# Altium PCB CoolerUI.PcbDoc
Units mm, origin at the board's own origin, x right, y up, seen from the top; angles counter-clockwise.
Board outline 152.4 x 101.6 mm, 2 copper layers (Top Layer, Bottom Layer); 39 components, 67 nets, 211 pads, 71 vias.
Unrouted connection lines stored in the file: 15.
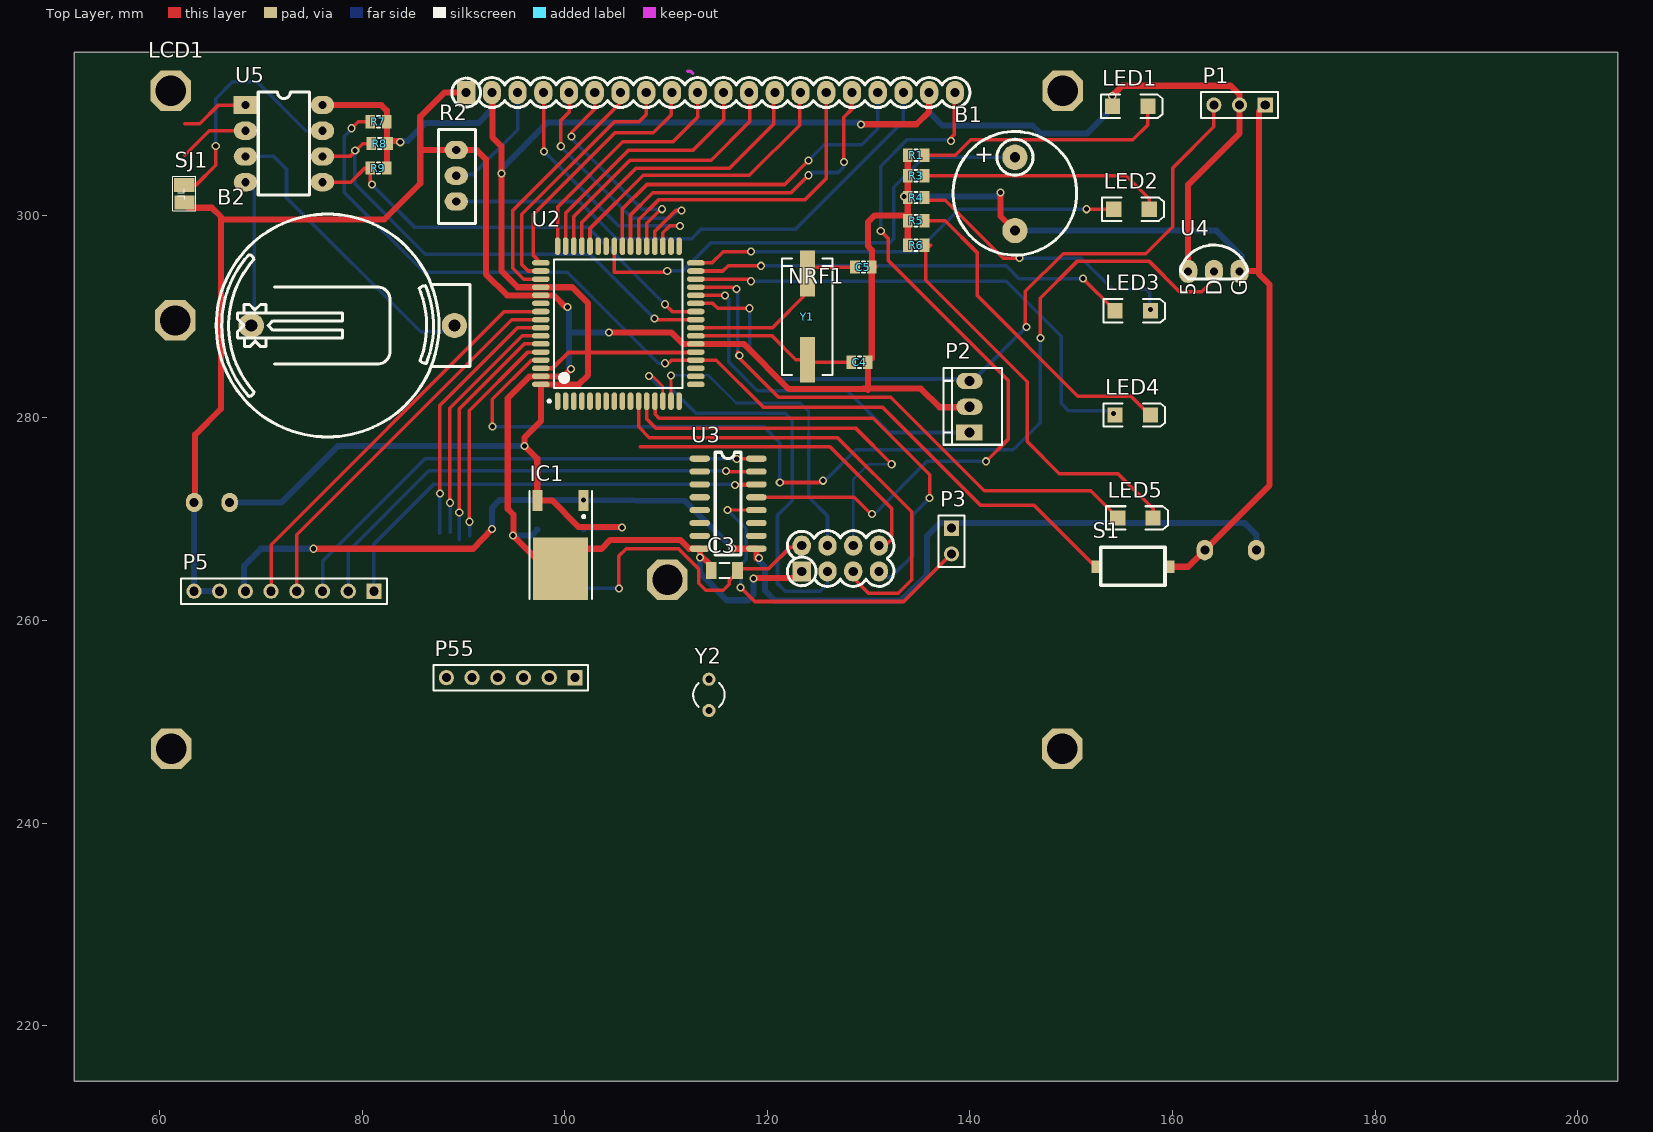
[diagram p0: Top Layer view]
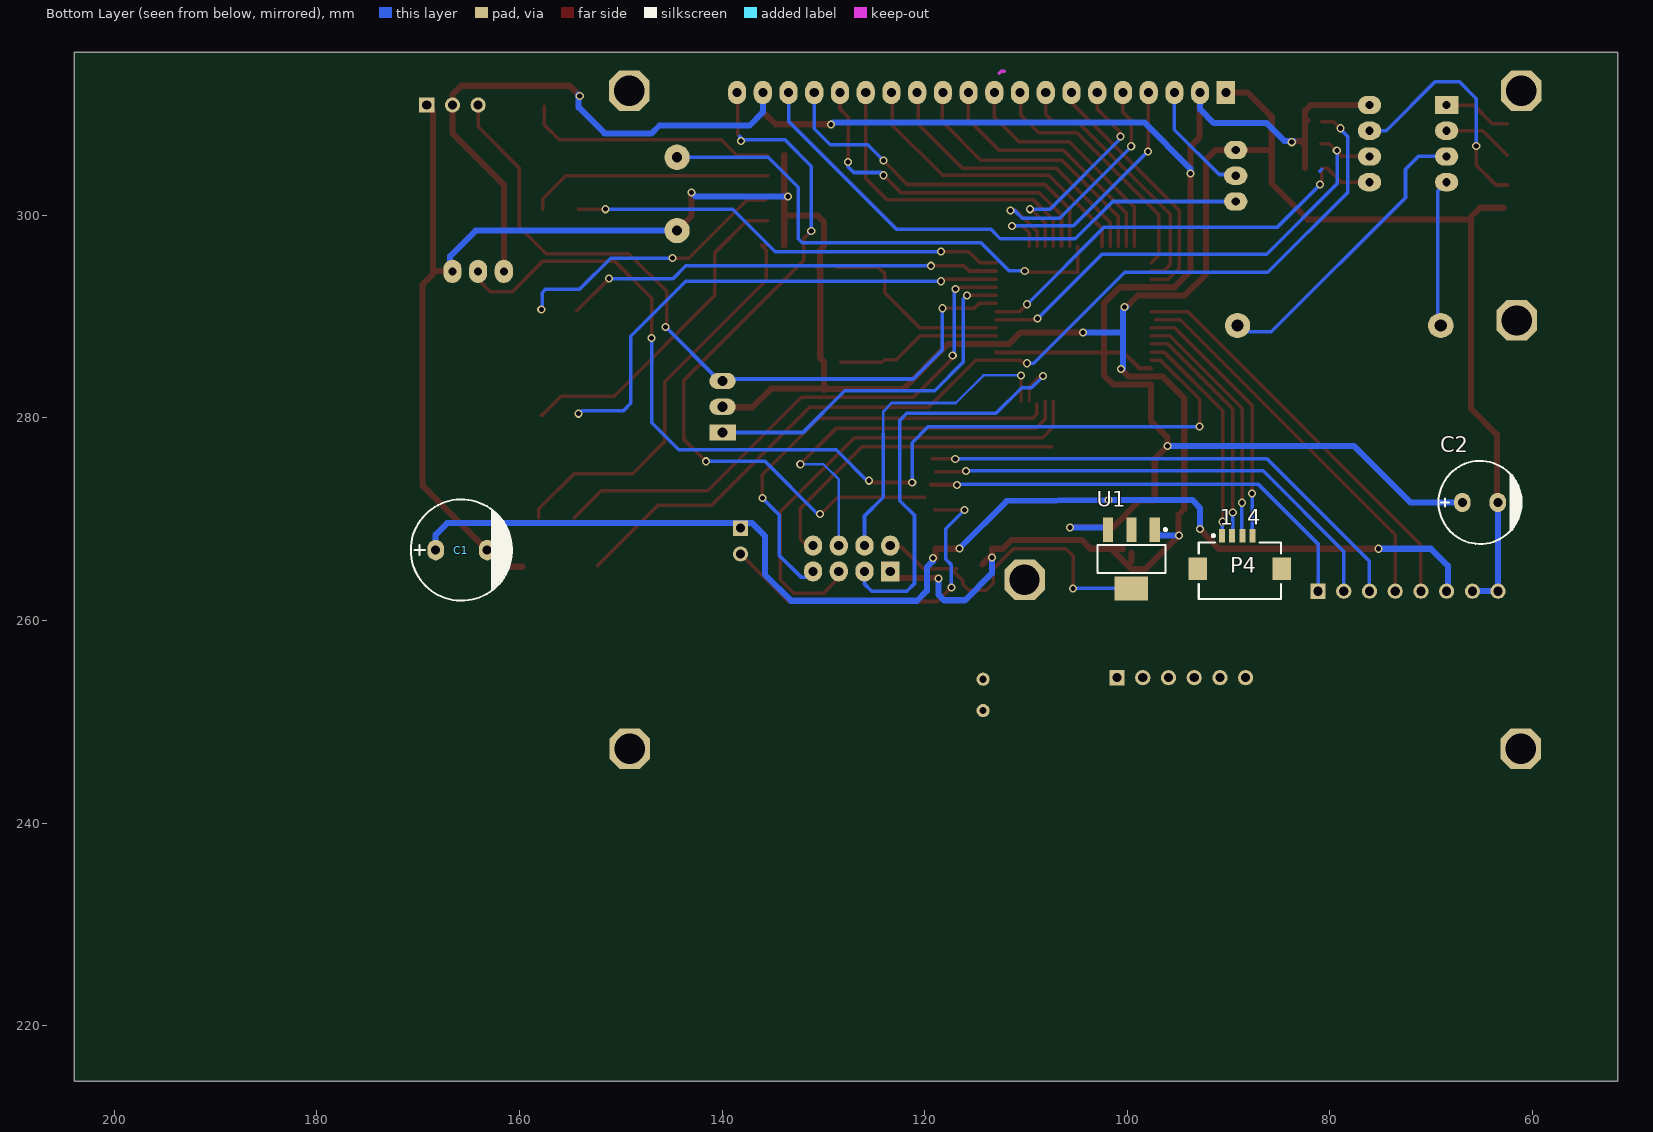
[diagram p1: Bottom Layer view, seen from below]
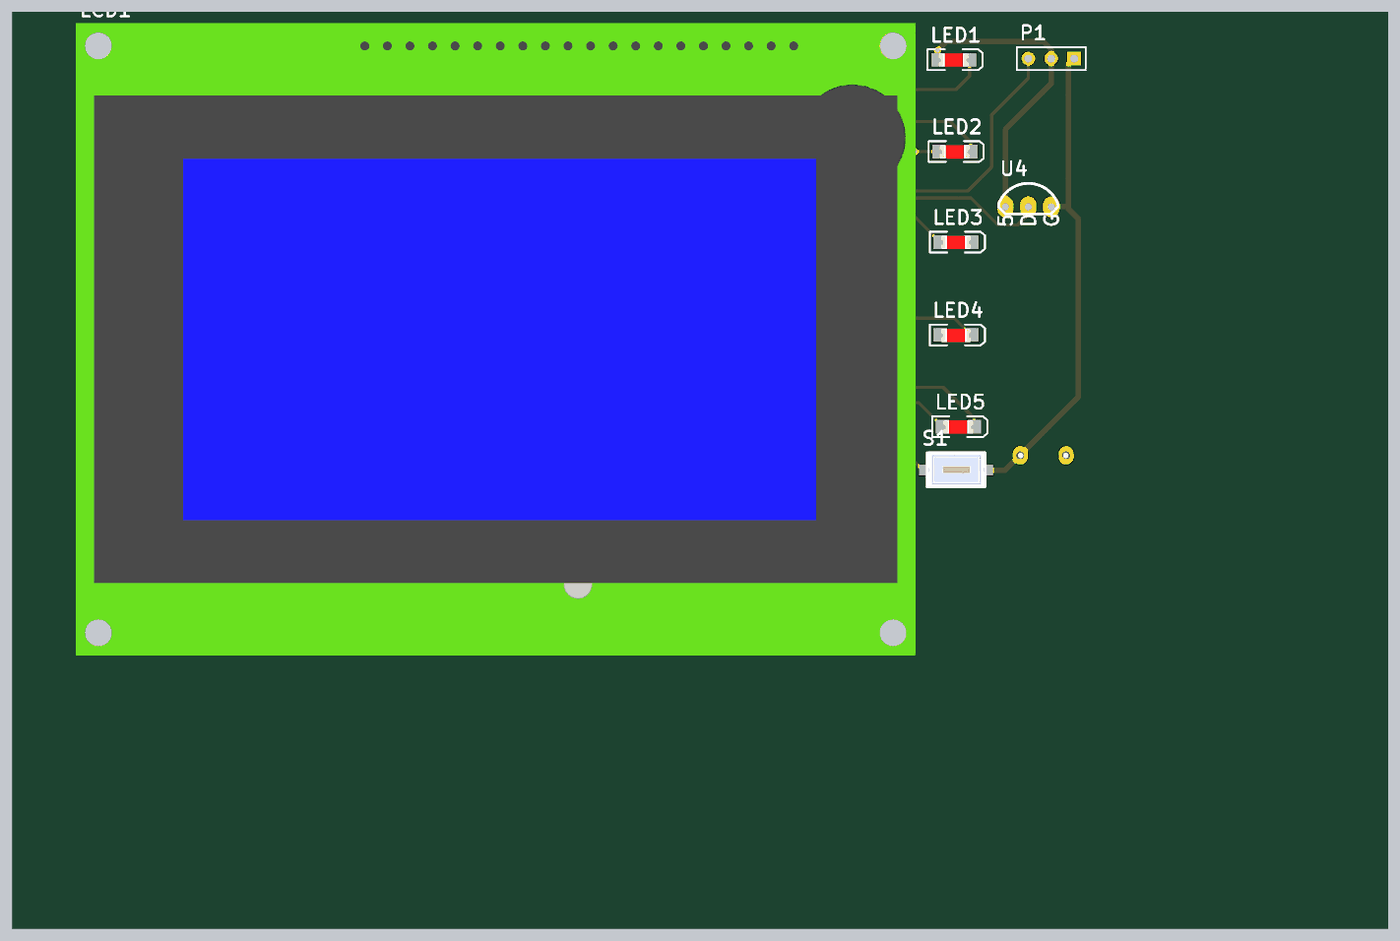
[diagram p2: 3D render of the assembled board from above, using the file's embedded part models]
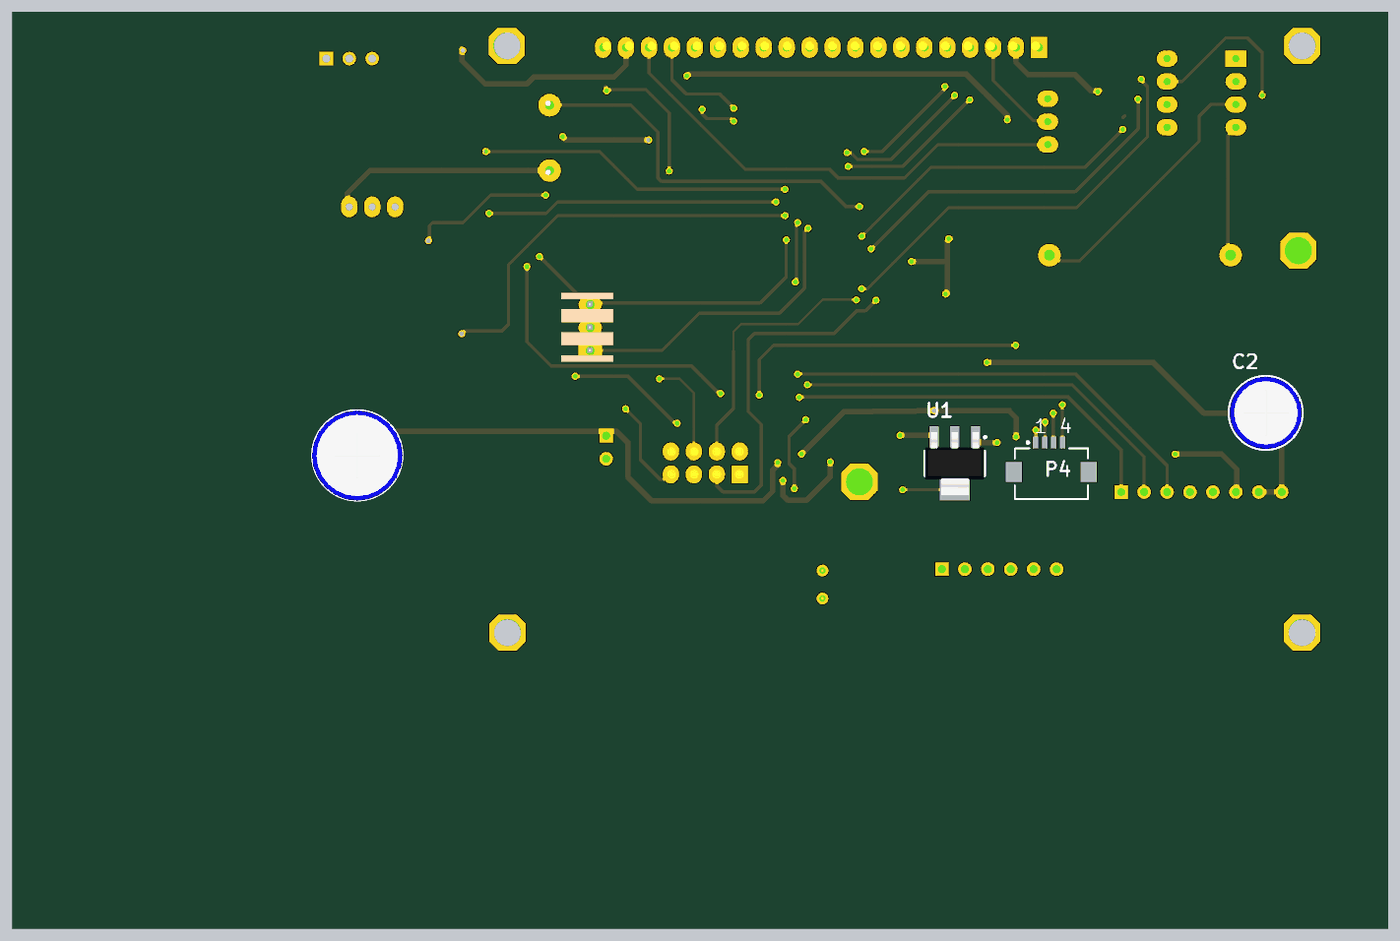
[diagram p3: 3D render of the assembled board from below, using the file's embedded part models]

## Layer stack, top to bottom
Top Solder: solder mask 0.0102, Solder Resist, Dk 3.5
Top Layer: signal copper 0.0356
Dielectric1: dielectric 0.32, FR-4, Dk 4.8
Bottom Layer: signal copper 0.0356
Bottom Solder: solder mask 0.0102, Solder Resist, Dk 3.5

## Board outline
51.562,214.503 203.962,214.503 203.962,316.103 51.562,316.103

## Design rules (kind name [scope] priority, off if disabled: settings)
Clearance Clearance_2 [InPolygon] p1: gap=0.8
Clearance Clearance_1 [(OnLayer('Keep-Out Layer'))] p2: gap=0
Clearance [All] p3: gap=0.2
ComponentClearance [All] p1 off: gap=0.254 collisioncheckmode=3 verticalgap=0.254 showdistances=FALSE
HoleSize [All] p1: absolutevalues=TRUE maxlimit=5 minlimit=0.025 maxpercent=80.000 minpercent=20.000
MinimumSolderMaskSliver [All] p1 off: minsoldermaskwidth=0.254
PolygonConnect [All] p1: connectstyle=Relief reliefconductorwidth=0.254 reliefentries=4 polygonreliefangle="90 Angle" airgapwidth=0.254
RoutingVias [All] p1: holewidth=0.5 width=0.8 viastyle="Through Hole" minholewidth=0.5 minwidth=0.8 maxholewidth=0.5 maxwidth=0.8
SilkToSilkClearance [All] p1 off: silktosilkclearance=0.254
SilkToSolderMaskClearance [IsPad] p1 off: minsilkscreentomaskgap=0.254 clearancetoexposedcopper=TRUE
SolderMaskExpansion [All] p1: expansion=0.102
Width [All] p1: maxlimit=5 minlimit=0.1 preferedwidth=0.3
24 further rules are at their usual default settings.

## Components (designator, comment, footprint, x,y, rotation, side; value= is the part's Value field where it differs from the comment)
B1 "Buzzer" Buzzer 144.145,301.879 r90 top
B2 "BAT" BAT_H 89.1,289.125 r0 top
C1 "1000uf" "cap 04" 165.735,266.954 r0 bottom
C2 "470uf" "cap 03" 65.151,271.653 r0 bottom
C3 "100nF" SMD_CAP_1206 117.05,264.925 r180 top
C4 "18pf" SMD_CAP_0805 129.921,285.496 r180 top
C5 "18pf" SMD_CAP_0805 130.302,294.894 r180 top
IC1 "L78M05" TO-252 99.575,268.478 r180 top
LCD1 "LCD 64*128 KS0108" "KS0108 Graphical LCD" 112.141,312.547 r180 top locked
LED1 "Power" "LED SMD 1206" 155.829,310.769 r0 top
LED2 "Power" "LED SMD 1206" 155.956,300.609 r0 top
LED3 "Power" "LED SMD 1206" 156.083,290.576 r0 top
LED4 "Power" "LED SMD 1206" 156.083,280.289 r0 top
LED5 "Power" "LED SMD 1206" 156.337,270.129 r0 top
NRF1 "NRF24L01+_Module" NRF24L01+_Module 127.762,265.811 r90 top
P1 "IR remote" HDR1X3 169.164,310.896 r180 top
P2 "HWR" "Polarized Header 3" 139.827,281.051 r90 top
P3 "FanOut" HDR1X2 138.176,269.113 r270 top
P4 "TouchSocket" FPC,1mm,4way 88.85,265.3 r180 bottom
P5 "Header 8" HDR1X8 81.153,262.89 r180 top locked
P55 "Programmer" HDR1X6 101,254.35 r180 top
R1 "10k" "RES 0805 (2012X06L)" 135.509,305.943 r180 top
R2 "POT" MOL_1 89.281,306.451 r270 top
R3 "10k" "RES 0805 (2012X06L)" 135.509,303.911 r180 top
R4 "10k" "RES 0805 (2012X06L)" 135.509,301.752 r180 top
R5 "10k" "RES 0805 (2012X06L)" 135.509,299.466 r180 top
R6 "10k" "RES 0805 (2012X06L)" 135.509,297.053 r180 top
R7 "10k" "RES 0805 (2012X06L)" 82.423,309.245 r180 top
R8 "10k" "RES 0805 (2012X06L)" 80.899,307.086 r0 top
R9 "10k" "RES 0805 (2012X06L)" 80.772,304.673 r0 top
S1 "Switch PB SMD" "Switch PB SMD" 152.908,267.208 r270 top
SJ1 "SmdJumper" "SMD Jumper" 62.475,302.125 r0 top
U1 "LM1117IMP-x.x" MP04A_N 99.575,266.065 r270 bottom
U2 "ATmega64-16AC" 64A_N 105.283,289.306 r90 top
U3 "ULN2003" SO-16 113.325,275.975 r0 top
U4 "LM35" LM35 161.55,294.475 r0 top
U5 "DS1307" DIP8 68.453,310.896 r0 top
Y1 "11.0592 MHz" "Crystal SMD" 123.952,290.576 r270 top
Y2 "32.768Khz" "XTAL RTC" 114.225,252.65 r0 top

## Footprints (in the part's own frame and the unit in brackets; to place one, negate y for a bottom-side part, rotate by r counter-clockwise, add the part's x,y. Pads: shape width x height; smd on the part's side, far side on the other; paste and mask are expansions set on the pad)
64A_N [mm] "Thin QFP, 64-Leads, Body 14x14mm, Pitch 0.8mm, IPC Medium Density"
  oval 1.75x0.55 smd: 1(-7.65,6) 2(-7.65,5.2) 3(-7.65,4.4) 4(-7.65,3.6) 5(-7.65,2.8) 6(-7.65,2) 7(-7.65,1.2) 8(-7.65,0.4) 9(-7.65,-0.4) 10(-7.65,-1.2) 11(-7.65,-2) 12(-7.65,-2.8) 13(-7.65,-3.6) 14(-7.65,-4.4) 15(-7.65,-5.2) 16(-7.65,-6) 33(7.65,-6) 34(7.65,-5.2) 35(7.65,-4.4) 36(7.65,-3.6) 37(7.65,-2.8) 38(7.65,-2) 39(7.65,-1.2) 40(7.65,-0.4) 41(7.65,0.4) 42(7.65,1.2) 43(7.65,2) 44(7.65,2.8) 45(7.65,3.6) 46(7.65,4.4) 47(7.65,5.2) 48(7.65,6)
  oval 0.55x1.75 smd: 17(-6,-7.65) 18(-5.2,-7.65) 19(-4.4,-7.65) 20(-3.6,-7.65) 21(-2.8,-7.65) 22(-2,-7.65) 23(-1.2,-7.65) 24(-0.4,-7.65) 25(0.4,-7.65) 26(1.2,-7.65) 27(2,-7.65) 28(2.8,-7.65) 29(3.6,-7.65) 30(4.4,-7.65) 31(5.2,-7.65) 32(6,-7.65) 49(6,7.65) 50(5.2,7.65) 51(4.4,7.65) 52(3.6,7.65) 53(2.8,7.65) 54(2,7.65) 55(1.2,7.65) 56(0.4,7.65) 57(-0.4,7.65) 58(-1.2,7.65) 59(-2,7.65) 60(-2.8,7.65) 61(-3.6,7.65) 62(-4.4,7.65) 63(-5.2,7.65) 64(-6,7.65)
  silkscreen extent -7.77,-6.35 6.35,6.95, body extent -7,-7 7,7, height 1.2
BAT_H [mm]
  round 2.5 hole 1.2: 1(0,0) 2(-20.066,0)
  silkscreen extent -23.52,-11 1.52,11
Buzzer [mm] "Magnetic Transducer"
  round 2.5 hole 1: 1(3.859,-0.297) 2(-3.38,-0.297)
  silkscreen extent -5.8,-6.4 6.4,5.8, body extent -5.67,-6.39 6.17,5.45, height 6.98
"cap 03" [mil]
  oval 65x75 hole 35: 1(68.9,0) 2(-68.9,0)
  silkscreen extent -161,-161 161,161, body extent -159,-159 157,158, height 473
"cap 04" [mil]
  oval 65x80 hole 35: 1(100,0) 2(-100,0)
  silkscreen extent -197,-197 197,197, body extent -198,-197 198,199, height 513
"Crystal SMD" [mm]
  rect 4.5x1.5 smd: 1(-3.683,0) 2(4.817,0)
  silkscreen extent -5.18,-2.5 6.32,2.5, body extent -5.64,-2.25 6.66,2.25, height 5.18
DIP8 [mm]
  rect 2.3x1.8 hole 0.8: 1(0,0)
  oval 2.3x1.8 hole 0.8: 2(0,-2.54) 3(0,-5.08) 4(0,-7.62) 5(7.62,-7.62) 6(7.62,-5.08) 7(7.62,-2.54) 8(7.62,0)
  silkscreen extent 1.27,-8.89 6.35,1.27
FPC,1mm,4way [mm] "FPC 1mm 4way AutoZif"
  rect 0.6x1.3 smd: 1(-1.78,3.07) 2(-0.78,3.07) 3(0.22,3.07) 4(1.22,3.07)
  rect 1.8x2.2 smd: 5(4.12,-0.18) 6(-4.18,-0.18)
  silkscreen extent -4.08,-3.18 4.02,3.19, body extent -4.08,-3.18 4.02,2.42, height 2
HDR1X2 [mm] "Connector; Header; 2 Position"
  rect 1.5x1.5 hole 0.9: 1(0,0)
  round 1.5 hole 0.9: 2(2.54,0)
  silkscreen extent -1.27,-1.27 3.81,1.27
HDR1X3 [mm] "Connector; Header; 3 Position"
  rect 1.5x1.5 hole 0.9: 1(0,0)
  round 1.5 hole 0.9: 2(2.54,0) 3(5.08,0)
  silkscreen extent -1.27,-1.27 6.35,1.27
HDR1X6 [mm] "Connector; Header; 6 Position"
  rect 1.5x1.5 hole 0.9: 1(0,0)
  round 1.5 hole 0.9: 2(2.54,0) 3(5.08,0) 4(7.62,0) 5(10.16,0) 6(12.7,0)
  silkscreen extent -1.27,-1.27 13.97,1.27
HDR1X8 [mm] "Connector; Header; 8 Position"
  rect 1.5x1.5 hole 0.9: 1(0,0)
  round 1.5 hole 0.9: 2(2.54,0) 3(5.08,0) 4(7.62,0) 5(10.16,0) 6(12.7,0) 7(15.24,0) 8(17.78,0)
  silkscreen extent -1.27,-1.27 19.05,1.27
"KS0108 Graphical LCD" [mm] "-"
  rect 1.8x2.3 hole 0.9: 1(21.885,0.42)
  oval 1.8x2.3 hole 0.9: 2(19.345,0.42) 3(16.805,0.42) 4(14.265,0.42) 5(11.725,0.42) 6(9.185,0.42) 7(6.645,0.42) 8(4.105,0.42) 9(1.565,0.42) 10(-0.975,0.42) 11(-3.515,0.42) 12(-6.055,0.42) 13(-8.595,0.42) 14(-11.135,0.42) 15(-13.675,0.42) 16(-16.215,0.42) 17(-18.755,0.42) 18(-21.295,0.42) 19(-23.835,0.42) 20(-26.375,0.42)
  silkscreen extent -27.85,-1.06 23.3,1.9, body extent -39.48,-2.25 53.53,67.75, height 12.5
"LED SMD 1206" [mm]
  rect 1.5x1.5 smd: 1(-1.75,0) 2(1.75,0)
  silkscreen extent -2.9,-1.15 3.2,1.15, body extent -1.65,-0.76 1.65,0.69, height 1.36
LM35 [mm]
  oval 1.8x2.3 hole 0.8: 1(0,0) 2(2.54,0) 3(5.08,0)
  silkscreen extent -0.76,-0.76 5.85,2.6
MOL_1 [mm]
  oval 1.8x2.3 hole 0.8: 1(0,0) 2(2.54,0) 3(5.08,0)
  silkscreen extent -2.03,-1.78 7.24,1.91
MP04A_N [mm] "SOT223, 4-Leads, Body 6.5x3.5mm, Pitch 2.3mm, Lead Span 7mm, IPC Medium Density"
  rect 2.4x1 smd: 1(-2.9,2.3) 2(-2.9,0) 3(-2.9,-2.3)
  rect 2.4x3.3 smd: 4(2.9,0)
  silkscreen extent -3.02,-3.35 1.4,3.47, body extent -3.49,-3.24 3.49,3.24, height 1.64
NRF24L01+_Module [mm]
  rect 2x1.8 hole 0.9: 1(-0.965,4.369)
  oval 2x1.8 hole 0.9: 2(1.575,4.369) 3(-0.965,1.829) 4(1.575,1.829) 5(-0.965,-0.711) 6(1.575,-0.711) 7(-0.965,-3.251) 8(1.575,-3.251)
  silkscreen extent -2.45,-4.73 3.06,5.79, body extent -2.33,-9.08 26.67,5.92, height 9.1
"Polarized Header 3" [mm]
  rect 1.6x2.6 hole 1: 1(-2.49,-0.12)
  oval 1.6x2.6 hole 1: 2(0.05,-0.12) 3(2.59,-0.12)
  silkscreen extent -3.7,-3.35 3.9,2.42, body extent -3.72,-3.35 3.9,2.45, height 10.75
"RES 0805 (2012X06L)" [mm] "Chip Resistor, 2-Leads, Body 2.0x1.3mm, IPC High Density _ (0.100 W)"
  rect 0.95x1.3 smd: 1(0,0) 2(1.65,0)
  silkscreen extent 0.67,-0.55 0.97,0.55, body extent -0.19,-0.63 1.84,0.64, height 0.6
"SMD Jumper" [mm]
  rect 2x1.4 smd: 1(-0.05,0.875) 2(-0.025,-0.85)
  silkscreen extent -1.18,-1.68 1.08,1.75
SMD_CAP_0805 [mm]
  rect 0.95x1.3 smd: 1(0,0) 2(1.65,0)
  silkscreen extent 0.67,-0.55 0.97,0.55, body extent -0.19,-0.63 1.84,0.63, height 0.65
SMD_CAP_1206 [mm]
  rect 1.05x1.7 smd: 1(0,0) 2(2.596,0)
  silkscreen extent 0.8,-0.75 1.8,0.75, body extent -0.22,-0.77 2.82,0.75, height 0.75
SO-16 [mil]
  oval 80x24 smd: 1(0,0) 2(0,-50) 3(0,-100) 4(0,-150) 5(0,-200) 6(0,-250) 7(0,-300) 8(0,-350) 9(220,-350) 10(220,-300) 11(220,-250) 12(220,-200) 13(220,-150) 14(220,-100) 15(220,-50) 16(220,0)
  silkscreen extent 60,-375 160,25
"Switch PB SMD" [mm]
  rect 1.2x1 smd: 1(1.9,6.785) 2(1.9,-0.415)
  silkscreen extent -0.03,0 3.74,6.36, body extent -0.1,-0.57 3.8,7.02, height 1.9
TO-252 [mm] "D-PAK/TO-252-AA; 3 Leads (1 Cropped); Body 10.1 (inc. leads) x 6.6 mm (LxW max)"
  rect 1x2.1 smd: 1(-2.285,-3.375) 3(2.285,-3.375)
  rect 5.4x6.2 smd: 4(0,3.375)
  silkscreen extent -3.08,-4.32 3.09,6.38, body extent -3.27,-4.11 3.27,5.83, height 2.39
"XTAL RTC" [mm]
  round 1.3 hole 0.7: 1(0,1.55) 2(0,-1.55)
  silkscreen extent -1.55,-1.19 1.55,1.17, body extent -1.6,-1.73 1.6,1.72, height 8.98

## Part data
C1 C2: library part Cap-Polar, "Polar Capacitor"
C3 C4 C5: library part Cap-Bipolar, "Bipolar Capacitor"
IC1: "Precision 500mA Regulator"
LED1 LED2 LED3 LED4 LED5: library part LED, "LED"
P1: library part "Header 3", "Header, 3-Pin"
P2: library part "3pin LHWR"
P3: library part "Header 2", "Header, 2-Pin"
P4: library part "Header FPC 4pin"
P5: "Header, 8-Pin"
P55: library part "Header 6", "Header, 6-Pin"
R1 R3 R4 R5 R6 R7 R8 R9: library part Resistor, "Resistor"
U1: "x.x Volt, 800mA Low-Dropout Linear Regulator, 4-pin SOT-223"
U2: "8-Bit AVR Microcontroller with 64K Bytes of In-System Programmable Flash Memory"
Y1 Y2: library part XTAL, "XTAL Crystal"

## Free pads (board coordinates)
  oct 4x4 hole 3: 0(61.1,312.3) 0(61.125,247.325) 0(61.534,289.622) 0(110.134,264.022) 0(149.1,247.325) 0(149.175,312.3)

## Via types
v1: diameter 0.8, hole 0.5, Top Layer to Bottom Layer, 71 vias

## Nets (pads, with @x,y where several pads share a name; then routed paths per layer and width w, separated by ;. In a path a pad name is that pad's centre, name@x,y a point inside that pad or via, vN(x,y) a via of type N, cw(c..) or ccw(c..) an arc to the next point about the centre after c; other vN are vias at no path point)
3V3: C3.1 NRF1.2 U1.4 | length 32.3
  Top Layer w0.35: v1@105.337,263.138 105.337,266.362 106.05,267.075 111.225,267.075 113.225,265.075 113.225,263.675 113.925,262.975 115.65,262.975 116.25,263.575 116.25,263.95 117.05,264.75 C3.1 ; C3.1@116.825,265.125 120.15,265.125 122.233,267.208 122.936,267.208 NRF1.2@123.393,266.751
  Bottom Layer w0.35: U1.4 105.335,263.165 v1(105.35,263.15)
AMPERADC: P5.4 U2.56 | length 38
  Top Layer w0.35: P5.4 73.533,268.478 94.742,289.687 U2.56@97.155,289.687
CE: NRF1.3 U2.14 | length 42.1
  Top Layer w0.254: v1(108.3,284.125) 108.65,284.125 109.683,283.092 U2.14
  Bottom Layer w0.35: v1@108.275,284.15 v1(108.3,284.125) 109.45,282.975 110.425,282.975 112.95,280.45 121.75,280.45 122.45,279.75 122.45,271.825 121,270.375 121,263.65 121.75,262.9 125.225,262.9 125.933,263.608 NRF1.3@125.933,264.211
CSN: NRF1.4 U2.15 | length 32.2
  Top Layer w0.254: 110.475,283.669 v1(110.475,284.175) ; U2.15 110.483,283.642
  Bottom Layer w0.254: v1@110.475,284.2 114.2,284.2 116.925,281.475 123.25,281.475 124.079,280.646 124.079,278.45
  Bottom Layer w0.35: 124.079,278.45 124.079,272.171 125.933,270.317 NRF1.4@125.933,266.751
"FAST TRIG": P5.1 U3.14 | length 47.4
  Top Layer w0.35: v1(116.8,273.375) U3.14@119.324,273.375 ; 117.221,273.431 U3.14@119.38,273.431
  Bottom Layer w0.35: P5.1 81.153,267.553 87.031,273.431 v1@116.8,273.431
GND: B1.2 C1.2 C2.2 C3.2 C4.1 C5.1 IC1.4 LCD1.1 NRF1.1 P1.1 P2.2 P5.7 P5.8 P55.1 R1.2 R2.1 R3.2 R4.2 R5.2 R6.2 S1.1 SJ1.2 U1.1 U2.22 U2.53 U2.63 U3.8 U4.3 | length 340.1
  Top Layer w0.6: SJ1.2@62.85,300.75 65.151,300.75 66.05,299.851 66.05,280.9 63.5,278.35 C2.2@63.5,271.907 ; 66.308,299.593 82.169,299.593 85.725,303.149 85.725,306.3 ; LCD1.1 88.099,312.127 85.725,309.753 85.725,306.3 ; IC1.4@99.575,265.811 IC1.4@99.575,266.675 ; v1(100.25,290.95) 100.083,290.95 98.927,292.106 U2.53 94.294,292.106 92.202,294.198 92.202,305.562 91.313,306.451 R2.1 85.876,306.451 85.725,306.3 ; IC1.4@100.407,267.085 103.637,267.085 104.502,267.95 111.4,267.95 112.265,267.085 U3.8 113.325,266.5 C3.2@114.289,265.536 ; v1(100.6,284.825) 99.881,284.106 U2.63 96.527,284.106 94.361,281.94 94.361,271.025 94.925,270.461 94.925,268.35 98.172,265.103 IC1.4 IC1.4@101.557,267.085 ; v1(104.375,288.425) 110.55,288.425 111.694,287.281 117.694,287.281 122.125,282.85 129.921,282.85 ; v1@118.618,264.211 NRF1.1@123.393,264.211 ; 129.45,282.9 135.15,282.9 136.999,281.051 P2.2@140.335,281.051 ; 129.921,282.779 C4.1 130.302,285.877 C5.1 ; C5.1@130.556,294.969 130.325,295.2 130.325,296.575 129.921,296.979 129.921,299.339 130.556,299.974 R5.2@133.859,299.974 ; R6.2 R5.2 R5.2@133.859,299.974 ; R1.2 R3.2 R4.2 R5.2@133.859,299.974 ; v1(143.002,302.26) 143.002,299.939 B1.2 ; S1.1 161.549,265.308 C1.2 169.6,273.359 169.6,293.15 168.529,294.221 ; U4.3 166.68,294.525 168.529,294.525 168.529,310.261 P1.1
  Bottom Layer w0.6: C2.2@63.373,271.625 P5.8 P5.7 ; v1(94.9,268.375) 96.725,268.375 U1.1@97.3,268.95 ; U1.1 U1.1@97.29,268.95 ; v1(100.25,290.95) 100.083,290.95 100.425,290.608 100.425,288.425 ; v1(100.6,284.825) 100.421,284.825 100.421,288.425 v1(104.375,288.425) ; v1(113.35,266.225) 113.35,264.65 116,262 118.1,262 118.618,262.518 v1(118.618,264.16) ; v1(133.477,301.879) 142.621,301.879 v1(143.002,302.26) ; B1.2 164.326,298.499 166.85,295.975 U4.3@166.85,294.8
LCD-K: LCD1.20 U3.13 | length 73.6
  Top Layer w0.35: 119.989,272.161 128.589,272.161 129.975,270.775 ; v1(131.191,298.45) 131.953,297.688 131.953,295.529 143.764,283.718 143.764,277.876 v1(141.605,275.717) ; v1(138.125,307.325) 138.125,307.67 138.43,307.975 138.43,312.041 LCD1.20
  Bottom Layer w0.35: v1(130.325,270.5) 130.55,270.5 135.767,275.717 v1(141.605,275.717) ; v1@131.381,298.26 v1(131.191,298.45) 131.191,304.866 133.775,307.45 138.275,307.45 138.275,307.82 138.125,307.67 v1(138.125,307.325)
MISO: NRF1.7 U2.13 | length 43.5
  Top Layer w0.35: U2.13@108.925,281.35 108.925,280.35 109.3,279.975 130.45,279.975 136.025,274.4 v1@136.025,272.088
  Bottom Layer w0.35: NRF1.7@131.013,264.211 131.089,264.287 132.207,264.287 134.375,266.455 134.375,270.437 v1@136.025,272.088
  other v1: 136.025,272.1
MOSI: NRF1.6 U2.12 | length 38.8
  Top Layer w0.35: U2.12 108.083,279.892 108.975,279 128.7,279 v1(132.275,275.425)
  Bottom Layer w0.254: NRF1.6 128.473,273.898 130,275.425 v1(132.275,275.425)
NetB1_1: B1.1 U2.41 | length 49.8
  Top Layer w0.35: U2.41 104.883,294.386 109.982,294.386 v1(110.109,294.513)
  Bottom Layer w0.35: v1(110.109,294.513) 111.633,294.513 114.427,297.307 132.08,297.307 132.461,297.688 132.461,302.768 135.431,305.738 B1.1
NetB2_1: B2.1 U5.3 | length 29.7
  Bottom Layer w0.35: U5.3 71.247,305.816 72.517,304.546 72.517,301.752 85.769,288.5 B2.1@89.375,288.5
NetB2_2: B2.2 U5.4 | length 15.2
  Bottom Layer w0.35: U5.4 69.325,302.404 69.325,288.734 B2.2@69.509,288.55
NetC4_2: C4.2 U2.23 Y1.2 | length 16.4
  Top Layer w0.35: U2.23 120.453,288.106 122.8,285.759 Y1.2 124.215,285.496 C4.2
NetC5_2: C5.2 U2.24 Y1.1 | length 19.3
  Top Layer w0.35: U2.24 120.504,288.906 123.952,292.354 Y1.1 124.587,294.894 C5.2
NetLCD1_4: LCD1.4 U2.35 | length 25.7
  Top Layer w0.35: LCD1.4@97.9,312.103 97.9,306.35 v1(97.925,306.325) ; U2.35 109.683,298.278 110.363,298.958 v1(111.379,298.958)
  Bottom Layer w0.35: v1@97.876,306.399 97.876,306.374 v1(97.925,306.325) ; v1@97.938,306.338 105.317,298.958 v1(111.379,298.958)
NetLCD1_5: LCD1.5 U2.36 | length 25.8
  Top Layer w0.35: v1(99.6,306.825) 99.6,309.375 100.416,310.191 LCD1.5 ; U2.36 108.883,298.406 110.959,300.482 v1(111.506,300.482)
  Bottom Layer w0.35: v1@99.55,306.825 106.655,299.72 110.363,299.72 111.125,300.482 v1(111.506,300.482)
NetLCD1_6: LCD1.6 U2.37 | length 21.8
  Top Layer w0.35: v1(100.675,307.8) 100.675,308.225 102.956,310.506 LCD1.6 ; U2.37 108.083,299.206 109.486,300.609 v1(109.601,300.609)
  Bottom Layer w0.35: v1@100.675,307.55 107.616,300.609 v1(109.601,300.609) ; LCD1.6@102.675,311.846 LCD1.6
NetLCD1_7: LCD1.7 U2.51 | length 25
  Top Layer w0.35: U2.51 95.944,293.706 94.869,294.781 94.869,300.482 105.496,311.109 LCD1.7
NetLCD1_8: LCD1.8 U2.50 | length 25.6
  Top Layer w0.35: U2.50 96.4,294.506 95.758,295.148 95.758,300.101 104.907,309.25 107.32,309.25 108.036,309.966 LCD1.8
NetLCD1_9: LCD1.9 U2.49 | length 25
  Top Layer w0.35: U2.49 96.901,296.038 96.901,300.101 104.95,308.15 108.725,308.15 110.49,309.915 110.49,312.041 LCD1.9
NetLCD1_10: LCD1.10 U2.48 | length 23.8
  Top Layer w0.35: U2.48 99.283,300.832 105.726,307.275 110.679,307.275 113.116,309.712 LCD1.10
NetLCD1_11: LCD1.11 U2.47 | length 25
  Top Layer w0.35: U2.47 100.083,300.235 106.298,306.45 112.675,306.45 115.697,309.472 LCD1.11@115.697,311.785
NetLCD1_12: LCD1.12 U2.46 | length 26.6
  Top Layer w0.35: U2.46 100.883,299.892 106.441,305.45 114.442,305.45 118.237,309.245 LCD1.12@118.237,311.658
NetLCD1_13: LCD1.13 U2.45 | length 27.8
  Top Layer w0.35: U2.45 101.683,299.295 107.063,304.675 116.275,304.675 120.65,309.05 LCD1.13@120.65,311.531
NetLCD1_14: LCD1.14 U2.44 | length 29.4
  Top Layer w0.35: U2.44 102.483,298.698 107.735,303.95 118.225,303.95 123.19,308.915 LCD1.14@123.19,311.658
NetLCD1_15: LCD1.15 U2.38 | length 31.3
  Top Layer w0.35: U2.38 107.283,299.561 109.247,301.525 123.7,301.525 125.816,303.641 LCD1.15
NetLCD1_16: LCD1.16 U2.39 | length 33.8
  Top Layer w0.35: U2.39 106.483,300.031 108.677,302.225 122.325,302.225 v1(124.063,303.963) ; v1(127.55,305.275) 127.55,309.7 128.356,310.506 LCD1.16
  Bottom Layer w0.35: v1(124.063,303.963) 124.336,304.236 127.011,304.236 127.55,304.775 v1(127.55,305.275) v1@127.55,305.325
NetLCD1_17: LCD1.17 U2.40 | length 35.7
  Top Layer w0.35: U2.40 105.683,300.628 108.105,303.05 121.7,303.05 v1(124.05,305.4)
  Bottom Layer w0.35: v1(124.05,305.4) 125.625,306.975 129.325,306.975 130.896,308.546 LCD1.17
NetLED1_2: LED1.2 R1.1 | length 25.1
  Top Layer w0.35: R1.1 138.557,305.943 140.081,307.467 156.083,307.467 157.579,308.963 LED1.2
NetLED2_1: LED2.1 U2.32 | length 43.5
  Top Layer w0.35: U2.32 114.531,295.306 115.643,296.418 v1(118.364,296.418) ; v1(151.511,300.609) LED2.1
  Bottom Layer w0.35: v1(118.364,296.418) 134.747,296.418 138.938,300.609 v1(151.511,300.609)
NetLED2_2: LED2.2 R3.1 | length 24.2
  Top Layer w0.35: R3.1 155.448,303.911 157.706,301.653 LED2.2
NetLED3_1: LED3.1 U2.31 | length 43.5
  Top Layer w0.35: U2.31 115.606,294.506 116.121,295.021 v1(119.38,295.021) ; v1(151.158,293.751) LED3.1
  Bottom Layer w0.35: v1(119.38,295.021) 143.579,295.021 144.849,293.751 v1(151.158,293.751)
NetLED3_2: LED3.2 R4.1 | length 27.8
  Top Layer w0.35: R4.1 135.763,301.498 137.552,301.498 143.275,295.775 v1(144.875,295.775)
  Bottom Layer w0.35: v1(144.875,295.775) 151,295.775 154.05,292.725 157.4,292.725 157.75,292.375 157.75,290.825 v1(157.85,290.725)
NetLED4_1: LED4.1 U2.30 | length 51.1
  Top Layer w0.35: U2.30 118.155,293.706 v1(118.364,293.497) ; v1(154.178,280.416) LED4.1@154.178,280.444 ; LED4.1@154.178,280.543 LED4.1@154.178,280.444 ; LED4.1 LED4.1@154.178,280.444
  Bottom Layer w0.35: v1(118.364,293.497) 143.578,293.497 149,288.075 149,281.45 149.725,280.725 153.869,280.725 v1(154.178,280.416) ; v1@154.178,280.444 v1@154.178,280.543
NetLED4_2: LED4.2 R5.1 | length 32.8
  Top Layer w0.35: R5.1 137.575,299.466 140.7,296.341 140.7,292.099 150.65,282.15 155.9,282.15 157.761,280.289 LED4.2
NetLED5_1: LED5.1 U2.29 | length 55.1
  Top Layer w0.35: U2.29 116.542,292.906 v1@116.967,292.481 ; v1@117.094,286.512 117.094,286.031 121.1,282.025 132.175,282.025 141.404,272.796 151.92,272.796 LED5.1
  Bottom Layer w0.35: v1@117.094,286.385 v1@117.094,292.735
  other v1: 117.225,286.15 116.967,292.735
NetLED5_2: LED5.2 R6.1 | length 40.5
  Top Layer w0.35: R6.1 136.144,297.053 135.636,296.545 135.636,293.589 145.65,283.575 145.65,277.675 148.825,274.5 154.625,274.5 158.087,271.038 LED5.2
NetP3_2: P3.2 U3.12 | length 34.9
  Top Layer w0.35: v1(116.075,270.9) U3.12@118.975,270.925 ; v1(117.348,263.271) 118.745,261.874 133.477,261.874 P3.2
  Bottom Layer w0.35: v1(116.075,270.9) 117.925,269.05 117.925,266.05 117.348,265.473 v1(117.348,263.271)
NetP4_1: P4.1 U2.60 | length 21.8
  Top Layer w0.35: v1@90.575,269.748 90.575,280.725 96.356,286.506 U2.60
  Bottom Layer w0.35: P4.1@90.591,268.351 v1(90.591,269.748)
NetP4_2: P4.2 U2.59 | length 23.9
  Top Layer w0.35: v1@89.575,270.383 89.575,280.875 96.006,287.306 U2.59
  Bottom Layer w0.35: P4.2@89.575,267.97 v1(89.575,270.65)
NetP4_3: P4.3 U2.58 | length 24.2
  Top Layer w0.35: v1@88.65,271.489 88.65,280.95 95.806,288.106 U2.58
  Bottom Layer w0.35: v1@88.675,271.5 88.686,271.489 P4.3@88.686,268.732
  other v1: 88.675,271.625
NetP4_4: P4.4 U2.57 | length 25.8
  Top Layer w0.35: v1@87.65,272.55 87.65,281.225 95.331,288.906 U2.57
  Bottom Layer w0.35: P4.4@87.67,268.605 v1@87.67,272.55
  other v1: 87.675,272.55
NetSJ1_1: SJ1.1 U5.7 | length 23.7
  Top Layer w0.35: SJ1.1 63.575,303 65.532,304.957 v1(65.532,306.832)
  Bottom Layer w0.35: v1(65.532,306.832) 65.532,311.531 67.183,313.182 69.596,313.182 74.422,308.356 U5.7
NetU2_4: U2.4 U3.5
NetU2_5: U2.5 U3.4
NetU2_6: U2.6 U3.3
NetU2_7: U2.7 U3.2
NetU2_8: U2.8 U3.1
NetU5_1: U5.1 Y2.2 | length 6.7
  Top Layer w0.35: 62.475,309.05 63.95,309.05 65.796,310.896 U5.1
NetU5_2: U5.2 Y2.1 | length 7
  Top Layer w0.35: 62.475,305.95 64.881,308.356 U5.2
NRFIRQ: NRF1.8 U2.9 | length 31.7
  Top Layer w0.35: 107.425,277.15 126.175,277.15 132.275,271.05 132.275,268.013 NRF1.8@131.394,267.132
PDI: P55.6 U2.2
PDO: P55.5 U2.3
"PUMP TRIG": P5.3 U3.16 | length 52.4
  Top Layer w0.35: v1(116.975,275.95) 119.232,275.95 119.253,275.971 v1@117.221,275.971
  Bottom Layer w0.35: P5.3 76.073,265.848 86.196,275.971 v1@116.975,275.971
RES: P55.3 R7.2 S1.2 U2.20 | length 98.2
  Top Layer w0.35: v1(78.925,308.6) 78.95,308.6 79.595,309.245 R7.2 ; v1@110.05,285.225 110.531,285.706 U2.20 114.944,285.706 119.575,281.075 131.35,281.075 141.026,271.399 146.304,271.399 S1.2@152.273,265.43
  Bottom Layer w0.35: v1@78.988,308.538 78.232,307.782 78.232,302.26 86.106,294.386 100.239,294.386 109.225,285.4 v1(109.9,285.4)
RXD: P1.3 P2.3 U2.27 | length 74.7
  Top Layer w0.35: U2.27 114.619,291.306 115.095,290.83 v1(118.237,290.83) ; v1@145.475,288.8 145.475,292.5 149.2,296.225 157.375,296.225 160.025,298.875 160.025,304.678 164.084,308.737 P1.3
  Bottom Layer w0.35: v1@118.237,290.703 118.237,286.724 121.116,283.845 140.445,283.845 v1(145.575,288.975)
SCK: NRF1.5 P55.4 U2.11 | length 46.6
  Top Layer w0.35: U2.11 107.283,279.117 108.35,278.05 126.925,278.05 134.239,270.736 134.239,264.033 132.906,262.7 129.984,262.7 NRF1.5@128.473,264.211
SCL: R8.1 U2.25 U5.6 | length 47.7
  Top Layer w0.35: U5.6 78.791,305.816 80.061,307.086 R8.1 ; v1@108.839,289.706 U2.25
  Bottom Layer w0.35: v1@79.248,306.323 79.248,303.149 86.233,296.164 102.489,296.164 v1(108.839,289.814)
  other v1: 79.3,306.425
SDA: R9.1 U2.26 U5.5 | length 44.5
  Top Layer w0.35: U5.5 78.867,303.276 80.264,304.673 R9.1 80.772,303.253 v1(80.975,303.05) ; v1(109.875,291.225) 110.594,290.506 U2.26
  Bottom Layer w0.35: 80.772,304.546 80.975,304.343 ; v1@81.113,303.189 81.113,302.887 85.15,298.85 102.25,298.85 v1(109.875,291.225)
"SLOW TRIG": P5.2 U3.15 | length 47.5
  Top Layer w0.35: v1(115.9,274.775) 115.97,274.705 U3.15
  Bottom Layer w0.35: P5.2 78.613,266.813 86.575,274.775 v1(115.9,274.775)
TEMP: U2.61 U4.2 | length 103.3
  Top Layer w0.35: v1(92.837,279.146) 92.837,281.837 96.706,285.706 U2.61 ; v1(121.225,273.625) 125.1,273.625 125.275,273.8 v1(125.5,273.8) ; v1(146.95,287.875) 146.95,291.825 150.575,295.45 157.725,295.45 160.7,292.475 162.875,292.475 U4.2@164.2,293.8
  Bottom Layer w0.35: v1(92.837,279.146) 119.634,279.146 121.225,277.555 v1(121.225,273.625) ; v1@125.25,273.825 125.7,273.825 128.735,276.86 144.272,276.86 146.95,279.538 v1(146.95,287.875)
TXD: P2.1 U2.28 | length 36.3
  Top Layer w0.35: U2.28 115.818,292.106 v1(115.824,292.1)
  Bottom Layer w0.35: v1(115.824,292.1) 116.205,291.719 116.205,285.496 119.001,282.7 127.875,282.7 132.014,278.561 P2.1
V12: C1.1 IC1.1 P3.1 P5.6 U3.9 | length 119.8
  Top Layer w0.6: v1(75.184,267.081) 90.932,267.081 ; 90.957,267.081 v1(92.789,269.013) ; v1(116.558,267.109) 116.582,267.085 U3.9 v1@118.913,266.112
  Bottom Layer w0.6: P5.6 68.326,263.017 68.326,265.401 70.006,267.081 v1(75.184,267.081) ; v1(92.789,269.013) 92.789,271.097 93.542,271.85 ; 93.542,271.907 v1(101.861,271.907) ; v1@101.861,271.894 111.887,271.78 v1(116.558,267.109) ; v1(119.175,266.15) 119.175,265.85 119.775,265.25 119.775,262.925 120.75,261.95 133.175,261.95 135.763,264.538 135.763,268.351 137.033,269.621 167.132,269.621 168.275,268.478 C1.1
VCC: C2.1 IC1.3 LCD1.2 LCD1.19 LED1.1 P1.2 P55.2 R7.1 R8.2 R9.2 U1.3 U2.21 U2.52 U2.62 U2.64 U4.1 U5.8 | length 243.2
  Top Layer w0.4: U2.62 98.806,284.906 100.35,286.45 101.092,286.45 ; 101.092,286.481 U2.21@112.933,286.481
  Top Layer w0.6: U5.8 81.879,310.896 82.423,310.352 R7.1 ; R7.1@82.203,309.372 82.422,309.153 R8.2@82.422,306.959 ; R9.2 R8.2@82.422,306.959 ; v1(83.75,307.225) 83.635,307.34 82.803,307.34 R8.2 R8.2@82.422,306.959 ; LCD1.2 92.837,312.086 92.837,307.721 93.726,306.832 93.726,294.513 95.333,292.906 U2.52 100.719,292.906 102.3,291.325 102.3,284.225 101.381,283.306 U2.64 97.633,279.683 96.013,278.063 v1(96.013,277.241) 97.275,275.979 IC1.3@97.275,271.853 ; IC1.3 98.747,271.853 101.375,269.225 105.6,269.225 v1(105.65,269.175) ; v1(129.25,308.975) 129.275,309 134.725,309 135.976,310.251 LCD1.19 ; v1@154.299,312.074 155.026,312.801 165.735,312.801 166.624,311.912 P1.2 166.624,308.102 161.55,303.028 U4.1@161.55,294.25
  Bottom Layer w0.6: C2.1 72.028,271.653 77.616,277.241 v1(96.013,277.241) ; v1(83.75,307.225) 83.681,307.225 83.566,307.34 84.455,307.34 86.233,309.118 91.44,309.118 92.796,310.474 LCD1.2 ; v1(93.75,304.125) 93.75,304.625 98.3,309.175 129.05,309.175 v1(129.25,308.975) ; U1.3@101.85,268.99 101.85,269.225 101.9,269.175 v1(105.65,269.175) ; LCD1.19 135.976,310.175 137.276,308.875 146.175,308.875 146.95,308.1 151.6,308.1 154.157,310.657 v1@154.157,311.933
  other v1: 154.051,311.785
VO: LCD1.3 R2.2 | length 11.2
  Bottom Layer w0.35: R2.2@89.662,304.038 90.913,304.038 95.336,308.461 LCD1.3
VOLTAGEADC: P5.5 U2.55 | length 40.8
  Top Layer w0.35: P5.5 70.993,267.493 94.006,290.506 U2.55
VOUT: LCD1.18 R2.3 | length 52.8
  Bottom Layer w0.35: R2.3@89.789,301.371 101.429,301.371 105.112,297.688 112.522,297.688 113.484,298.65 122.8,298.65 133.436,309.286 LCD1.18
pads on no net: P4.5 P4.6 U1.2 U2.1 U2.10 U2.16 U2.17 U2.18 U2.19 U2.33 U2.34 U2.42 U2.43 U2.54 U3.6 U3.7 U3.10 U3.11

## Keep-outs
Keep-Out Layer:
  lines w0.35: 112.134,314.222 112.434,314.222 112.634,314.022

## Text inside footprints (layer, text, board x,y; h text height)
B1: Top Overlay "+" at 142.156,304.976 h1.7 r90
P4: Bottom Overlay "4" at 88.13,269.47 h1.5; Bottom Overlay "1" at 90.88,269.47 h1.5
U4: Top Overlay "5" at 162.312,292.062 h1.52 r90; Top Overlay "D" at 164.852,292.062 h1.52 r90; Top Overlay "G" at 167.392,292.062 h1.52 r90